# Altium PCB PCB.PcbDoc
Units mm, origin at the board's own origin, x right, y up, seen from the top; angles counter-clockwise.
Board outline 149.35 x 79.76 mm, 2 copper layers (Top Layer, Bottom Layer); 13 components, 17 nets, 83 pads, 0 vias.
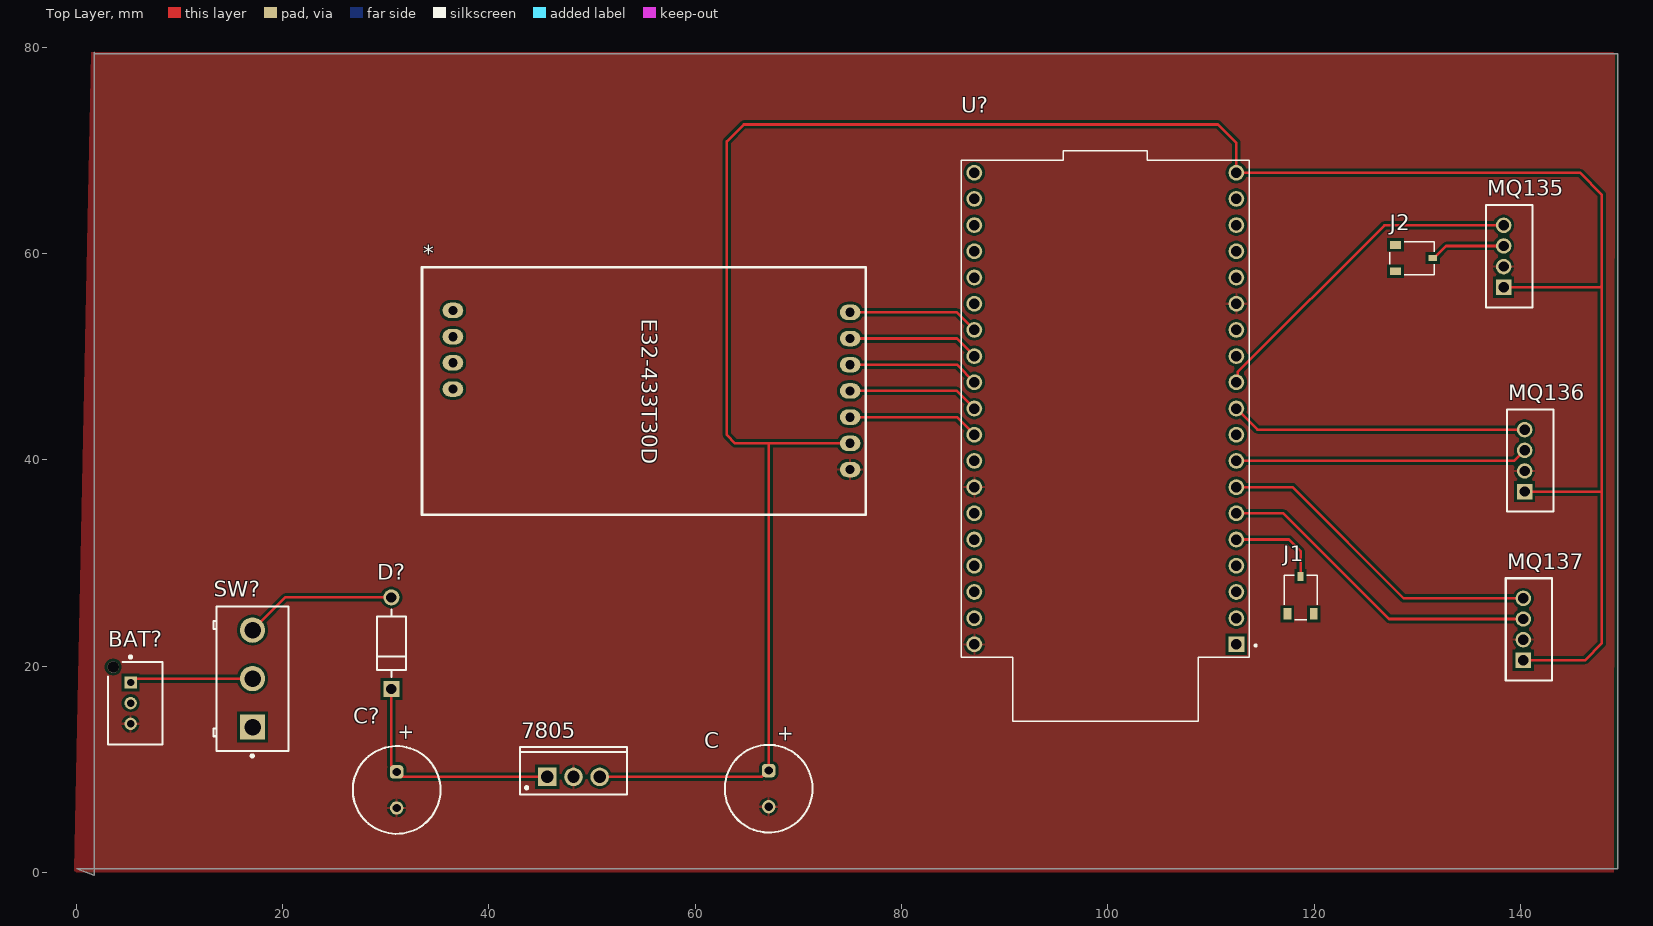
[diagram p0: Top Layer view]
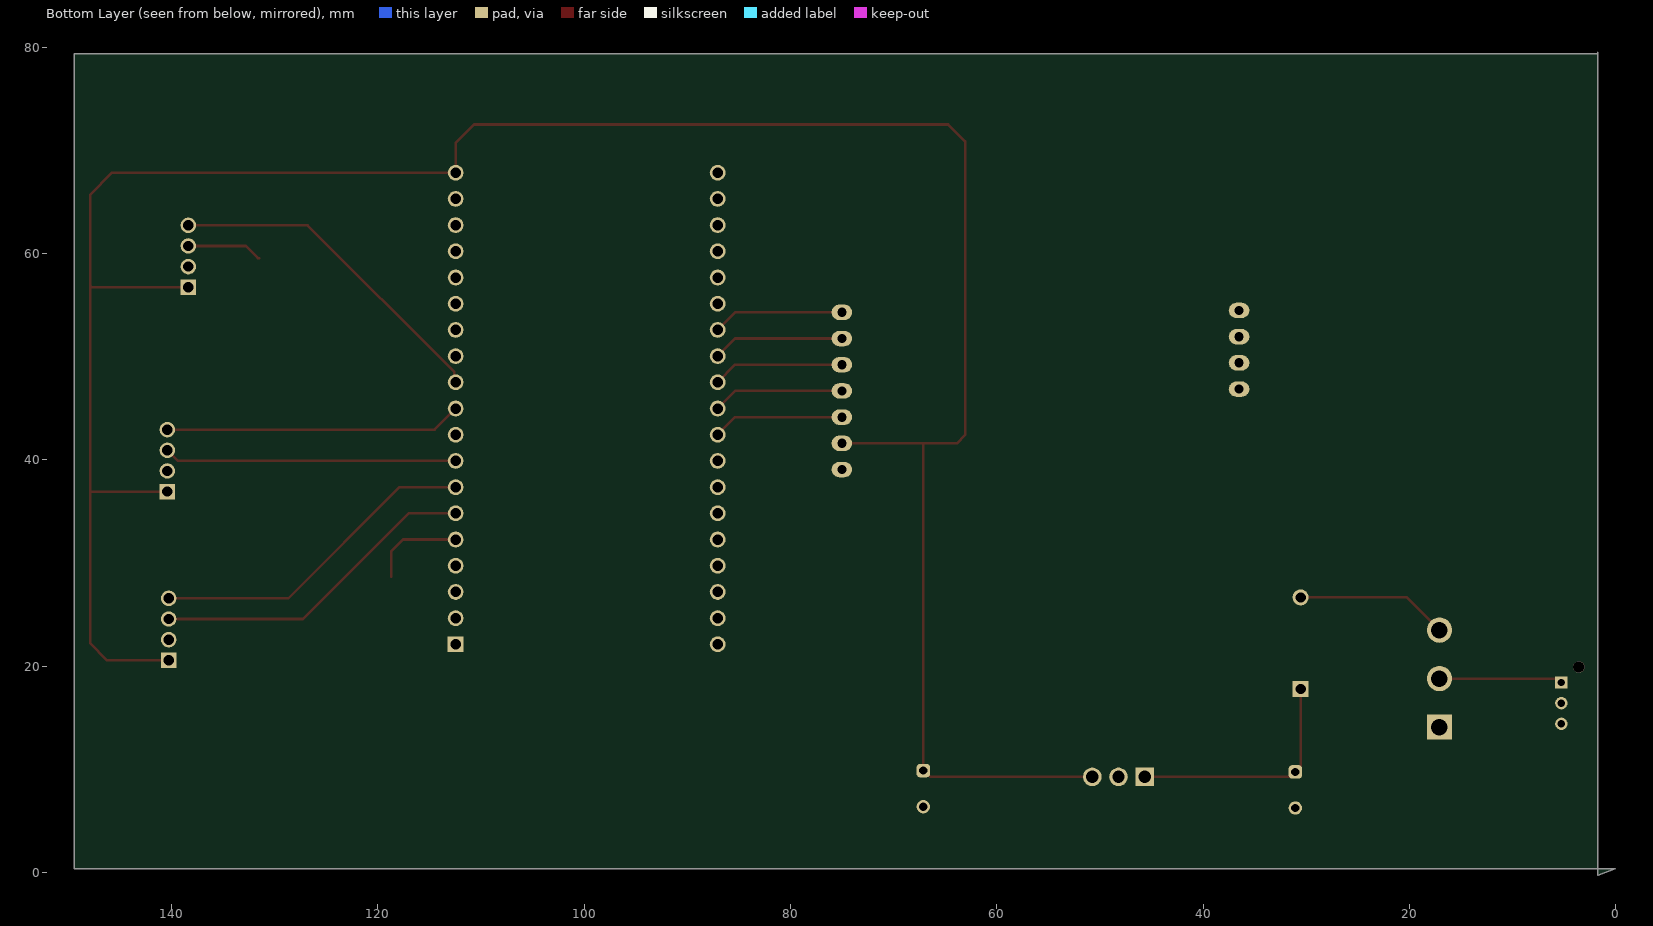
[diagram p1: Bottom Layer view, seen from below]

## Layer stack, top to bottom
Top Solder: solder mask 0.0102, Solder Resist, Dk 3.5
Top Layer: signal copper 0.0356
Dielectric 1: dielectric 0.32, FR-4, Dk 4.8
Bottom Layer: signal copper 0.0356
Bottom Solder: solder mask 0.0102, Solder Resist, Dk 3.5

## Board outline
0.072,0.381 149.424,0.381 149.424,79.375 1.85,79.375 1.723,79.502 1.723,-0.254

## Design rules (kind name [scope] priority, off if disabled: settings)
Clearance [All] p1: gap=0.254 ignorepadtopadclearanceinfootprint=FALSE
PolygonConnect [All] p1: connectstyle=Relief reliefconductorwidth=0.254 reliefentries=4 polygonreliefangle="90 Angle" airgapwidth=0.254
RoutingVias [All] p1: holewidth=0.711 width=1.27 viastyle="Through Hole" minholewidth=0.711 minwidth=1.27 maxholewidth=0.711 maxwidth=1.27
SolderMaskExpansion [All] p1: expansion=0 istentingtop=FALSE
SupplyNets "Schematic Supply Nets_1" [InNet('+5')] p1: voltage=0.000
SupplyNets "Schematic Supply Nets" [InNet('GND')] p2: voltage=0.000
Width [All] p1: maxlimit=0.254 minlimit=0.254 preferedwidth=0.254
30 further rules are at their usual default settings.

## Components (designator, comment, footprint, x,y, rotation, side; value= is the part's Value field where it differs from the comment)
7805 "L7805CP" TO220FP 48.205,9.271 r0 top
* "E32-433T30D" E32-433T30D 33.521,58.683 r270 top
BAT? "B03B-PASK-1(LF)(SN)" FP-B03B-PASK-1_LF_SN-MFG 5.729,16.415 r90 top
C "860160274015" WCAP-ATLL_D8H11.5 67.128,8.128 r90 top
C? "860160274015" WCAP-ATLL_D8H11.5 31.06,8.001 r90 top
D? "1N4007" FP-1N4007-MFG 30.552,22.225 r90 top value=15pF
J1 "BM01B-ACHSS-A-GAN-ETF(LF)(SN)" JST_BM01B-ACHSS-A-GAN-ETF(LF)(SN) 118.69,26.67 r0 top
J2 "BM01B-ACHSS-A-GAN-ETF(LF)(SN)" JST_BM01B-ACHSS-A-GAN-ETF(LF)(SN) 129.485,59.563 r270 top
MQ135 "B4B-PH-K-S(LF)(SN)" JST-B4B-PH-K-S_V 138.925,59.738 r90 top
MQ136 "B4B-PH-K-S(LF)(SN)" JST-B4B-PH-K-S_V 140.957,39.926 r90 top
MQ137 "B4B-PH-K-S(LF)(SN)" JST-B4B-PH-K-S_V 140.83,23.574 r90 top
SW? "CS12ANW03" FP-CS12ANW03-MFG 17.09,18.796 r90 top
U? "ESP32-DEVKITC" MODULE_ESP32-DEVKITC 99.767,44.968 r180 top

## Footprints (in the part's own frame and the unit in brackets; to place one, negate y for a bottom-side part, rotate by r counter-clockwise, add the part's x,y. Pads: shape width x height; smd on the part's side, far side on the other; paste and mask are expansions set on the pad)
E32-433T30D [mm]
  oval 1.5x2 hole 0.9: 1(4.38,41.5) 2(6.92,41.5) 3(9.46,41.5) 4(12,41.5) 5(14.54,41.5) 6(17.08,41.5) 7(19.62,41.5) 8(11.82,3) 9(9.28,3) 10(6.74,3) 11(4.2,3)
  silkscreen extent 0,0 24,43
FP-1N4007-MFG [mm]
  rect 1.55x1.55 hole 1 paste-2539.97 mask+0: 1(-4.44,0)
  round 1.55 hole 1 paste-2539.97 mask+0: 2(4.44,0)
  silkscreen extent -3.26,-1.4 3.26,1.4, body extent -5.32,-1.5 5.32,1.5, height 0.25
FP-B03B-PASK-1_LF_SN-MFG [mm]
  rect 1.2x1.2 hole 0.7 paste-2539.97 mask+0: 1(2,0.45)
  round 1.2 hole 0.7 paste-2539.97 mask+0: 2(0,0.45) 3(-2,0.45)
  round 1.1 hole 1.1 unplated paste-2539.97 mask+0: ""(3.5,2.15)
  silkscreen extent -4,-2.65 4.6,2.65, body extent -4.1,-2.75 4.15,2.8, height 0.25
FP-CS12ANW03-MFG [mm]
  rect 2.45x2.45 hole 1.6 paste-2539.97 mask+0: 1(-4.7,0)
  round 2.45 hole 1.6 paste-2539.97 mask+0: 2(0,0) 3(4.7,0)
  silkscreen extent -7.62,-3.5 7,3.8, body extent -7.1,-3.6 7.1,3.91, height 0.25
JST-B4B-PH-K-S_V [mm] "Connector, 4-Leads, Body 9.9x4.5mm, Pitch 2mm"
  rect 1.5x1.5 hole 1: 1(-3,0.55)
  round 1.5 hole 1: 2(-1,0.55) 3(1,0.55) 4(3,0.55)
  silkscreen extent -4.95,-2.25 4.95,2.25, body extent -4.95,-2.25 4.95,2.25, height 6
JST_BM01B-ACHSS-A-GAN-ETF(LF)(SN) [mm]
  rect 0.6x0.85 smd paste+0 mask+0.102: 1(0,2.025)
  rect 0.75x1.1 smd paste+0 mask+0.102: MP1(-1.275,-1.6) MP2(1.275,-1.6)
  silkscreen extent -1.6,-2.15 1.6,2.15
MODULE_ESP32-DEVKITC [mm]
  rect 1.53x1.53 / inner round 1.53 / far side rect 1.53x1.53 hole 1.02: 1(-12.7,22.85)
  round 1.53 hole 1.02: 2(-12.7,20.31) 3(-12.7,17.77) 4(-12.7,15.23) 5(-12.7,12.69) 6(-12.7,10.15) 7(-12.7,7.61) 8(-12.7,5.07) 9(-12.7,2.53) 10(-12.7,-0.01) 11(-12.7,-2.55) 12(-12.7,-5.09) 13(-12.7,-7.63) 14(-12.7,-10.17) 15(-12.7,-12.71) 16(-12.7,-15.25) 17(-12.7,-17.79) 18(-12.7,-20.33) 19(-12.7,-22.87) 20(12.7,-22.87) 21(12.7,-20.33) 22(12.7,-17.79) 23(12.7,-15.25) 24(12.7,-12.71) 25(12.7,-10.17) 26(12.7,-7.63) 27(12.7,-5.09) 28(12.7,-2.55) 29(12.7,-0.01) 30(12.7,2.53) 31(12.7,5.07) 32(12.7,7.61) 33(12.7,10.15) 34(12.7,12.69) 35(12.7,15.23) 36(12.7,17.77) 37(12.7,20.31) 38(12.7,22.85)
  silkscreen extent -14.67,-25 13.95,30.3, body extent -13.97,-27.9 13.97,27.2, height 6.69
TO220FP [mm] "TO, Thru-Hole, Vertical, Heatsink Mounted; 3 In-Line Leads; Pitch 2.54 mm"
  rect 1.8x1.8 hole 1.2: 1(-2.54,0)
  round 1.8 hole 1.2: 2(0,0) 3(2.54,0)
  silkscreen extent -5.2,-1.7 5.2,2.9, body extent -5.25,-1.75 5.25,2.95, height 20
WCAP-ATLL_D8H11.5 [mm] "Aluminum Electrolytic Capacitors, 8x11.5mm"
  rrect50% 1.3x1.3 hole 0.8: 1(1.75,0)
  round 1.3 hole 0.8: 2(-1.75,0)
  silkscreen extent -4.25,-4.25 4.25,4.25, body extent -3.99,-4 4,4, height 11.81

## Part data
7805: library part CMP-0244-00474-1, "Positive Voltage Regulator, 5V, 3-Pin TO-220FP", ComponentLink1Description="Manufacturer URL", ComponentLink1URL=http://www.st.com, ComponentLink2Description=Datasheet, ComponentLink2URL=http://www.st.com/internet/com/TECHNICAL_RESOURCES/TECHNICAL_LITERATURE/DATASHEET/CD00000444.pdf, DatasheetVersion=16/11/2011, PackageDescription="TO, Thru-Hole, Vertical, Heatsink Mounted; 3 In-Line Leads; Pitch 2.54 mm", PackageReference=TO220FP, PackageVersion=2011
BAT?: library part CMP-17439-000193-1, "CONN HEADER VERT 3POS 2MM", Color=Natural, Current Rating=3A, Flammability Rating="UL94 V-0", Housing Color=White, Voltage Rating=250V, Connector Type=Header, Contact Finish - Mating=TIN, Contact Material="Copper Alloy", Contact Mating Length=0.126inch, Contact Plating=Tin, Contact Shape=Square, Contact Type="Male Pin", Fastening Type=Ramp, Insulation Color=Natural, Insulation Material=PBT, Lead Free="Lead Free", Mated Stacking Heights=14.9mm, Mount="Through Hole", Number of Contacts=3, Number of Positions=3, Number of Rows=1, Orientation=Straight, Packaging=Bulk, Pitch=2mm, Series=PA, Termination=Solder
C C?: library part CMP-03913-54007388-2, "Aluminium Electrolytic Capacitor-Leaded Rohs Compliant: Yes", Capacitance=270µF, Case/Package=Radial, Leakage Current=27µA, Max Operating Temperature=105°C, Min Operating Temperature=-55°C, Ripple Current=420mA, Tolerance=20%, Voltage Rating=10V, Diameter=8mm, Height - Seated (Max)=13.0048mm, Impedance=530mΩ, Lead Pitch=3.5052mm, Length=11.5mm, Life (Hours)=7000hours, Mount="Through Hole", Packaging="Tape & Box (TB)", Pitch=3.5mm, Polarity=Polar, RoHS=Compliant
D?: library part CMP-123542-000001-1, "Rectifier diode 1000 V 1 A DO-41, ,", Capacitance=15pF, Forward Current=1A, Manufacturer=Diotec, Max Junction Temp=+175°C, Max Repetitive Reverse Voltage=1000V, Max Surge Forward Current=27A, Peak Reverse Current=5uA, Temperature="-50°C to +175°C", Temperature Range Low=-50°C, Automotive=No, Category=Diode, ComponentLink2Description=Datasheet, ComponentLink2URL=https://datasheet.octopart.com/1N4007-Diotec-datasheet-62346875.pdf, Device Class L1="Discrete Semiconductors", Device Class L2=Diodes, Device Class L3="Rectifier Diodes", Height=2.8mm, Ipc Land Pattern Name=DIOAD888W100L520D280, Lead Free=Yes, Manufacturer Part Number=1N4007, Octopart=https://octopart.com/1n4007-diotec-4040411, Package=1N4007, Reverse Voltage=1000V, RoHS=TRUE, Temperature Range High=+175°C
J1 J2: "Connector Header Surface Mount, Right Angle 1 position", Package=None, Check_prices=https://www.snapeda.com/parts/BM01B-ACHSS-A-GAN-ETF(LF)(SN)/JST/view-part/?ref=eda, MF="JST Sales America Inc.", MP=BM01B-ACHSS-A-GAN-ETF(LF)(SN), SnapEDA_Link=https://www.snapeda.com/parts/BM01B-ACHSS-A-GAN-ETF(LF)(SN)/JST/view-part/?ref=snap
MQ135 MQ136 MQ137: library part CMP-2000-05165-1, "Male Header, Pitch 2 mm, 1 x 4 Position, Height 6 mm, Tail Length 3.4 mm, -25 to 85 degC, RoHS, Bulk", Manufacturer=JST, Datasheet URL=http://datasheet.octopart.com/B4B-PH-K-S%28LF%29%28SN%29-JST-datasheet-10558886.pdf, Datasheet Version=Apr-09, Manufacturer URL=http://www.jst.com/home2.html, No of Positions=4, Pitch=2mm, Style/Orientation=StraightHeader/Plug, Termination=Crimp, Type=ShroudedHeader
SW?: library part CMP-31746-000002-1, "SWITCH SLIDE SPDT 3A 125V", Contact Current Rating=3A, Flammability Rating="UL94 V-0", Max Operating Temperature=85°C, Max Voltage Rating (AC)=250V, Min Operating Temperature=-30°C, Package Quantity=1, Voltage Rating (AC)=125V, Actuator Length=5.1mm, Actuator Material=Nylon, Actuator Type=Standard, Contact Material=Copper, Contact Plating=Silver, Contact Style=Non-Shorting, Current Rating=3A, Depth=7.5mm, Electrical Life=20000Cycles, Illumination Type=Non-Illuminated, Lead Free="Lead Free", Length=14mm, Max Current Rating=3A, Mechanical Life=50000Cycles, Mount="Through Hole", Orientation=Vertical, Packaging=Tray, Primary Type=SWITCH, Reach SVHC Compliant=Yes, RoHS Compliant=Yes, Series=CS, Switch Function=On-On, Switch Travel=2.2mm, Termination="PC Pin", Throw Configuration=SPDT
U?: "Transceiver; 802.11 b/g/n (Wi-Fi, WiFi, WLAN), BluetoothÂ® Smart Ready 4.x Dual Mode", Package=None, Check_prices=https://www.snapeda.com/parts/ESP32-DEVKITC-32D-F/Espressif+Systems/view-part/?ref=eda, MF="Espressif Systems", MP=ESP32-DEVKITC-32D-F, SnapEDA_Link=https://www.snapeda.com/parts/ESP32-DEVKITC-32D-F/Espressif+Systems/view-part/?ref=snap

## Nets (pads, with @x,y where several pads share a name; then routed paths per layer and width w, separated by ;. In a path a pad name is that pad's centre, name@x,y a point inside that pad or via, vN(x,y) a via of type N, cw(c..) or ccw(c..) an arc to the next point about the centre after c; other vN are vias at no path point)
+5: 7805.3 *.6 C.1 MQ135.1 MQ136.1 MQ137.1 U?.19 | length 248
  Top Layer w0.254: 7805.3 66.414,9.271 67.021,9.878 C.1 67.128,41.603 ; *.6 67.128,41.603 ; MQ135.1 147.752,56.738 147.9,56.887 ; MQ137.1 146.249,20.574 147.9,22.225 147.9,36.957 ; MQ136.1 147.869,36.926 147.9,36.957 ; 67.128,41.603 63.879,41.603 63.064,42.418 63.064,70.866 64.715,72.517 110.689,72.517 112.467,70.739 U?.19 145.761,67.838 147.9,65.699 147.9,56.887 ; 147.9,36.957 147.9,56.887
GND: 7805.2 *.7 BAT?.3 C.2 C?.2 MQ135.2 MQ136.2 MQ137.2 U?.14 U?.32 U?.38
Net7805_1: 7805.1 C?.1 D?.1 | length 23
  Top Layer w0.254: D?.1 30.552,10.366 31.06,9.858 C?.1 31.168,9.751 31.648,9.271 7805.1
Net*_1: *.1 U?.26 | length 12.8
  Top Layer w0.254: *.1 85.362,54.303 U?.26
Net*_2: *.2 U?.27 | length 12.8
  Top Layer w0.254: *.2 85.362,51.763 U?.27
Net*_3: *.3 U?.28 | length 12.8
  Top Layer w0.254: *.3 85.362,49.223 U?.28
Net*_4: *.4 U?.29 | length 12.8
  Top Layer w0.254: *.4 85.362,46.683 U?.29
Net*_5: *.5 U?.30 | length 12.8
  Top Layer w0.254: *.5 85.362,44.143 U?.30
NetBAT?_1: BAT?.1 SW?.2 | length 12
  Top Layer w0.254: BAT?.1 5.66,18.796 SW?.2
NetD?_2: D?.2 SW?.3 | length 14.8
  Top Layer w0.254: SW?.3 20.259,26.665 D?.2
NetJ1_1: J1.1 U?.5 | length 9.2
  Top Layer w0.254: U?.5 117.567,32.278 117.569,32.28 118.69,31.159 J1.1
NetJ2_1: J2.1 MQ135.3 | length 7.4
  Top Layer w0.254: J2.1 131.635,59.563 132.81,60.738 MQ135.3
NetMQ135_4: MQ135.4 U?.11 | length 32.7
  Top Layer w0.254: U?.11 112.589,47.64 112.589,48.509 126.818,62.738 MQ135.4
NetMQ136_3: MQ136.3 U?.8 | length 28.4
  Top Layer w0.254: U?.8 139.379,39.898 MQ136.3
NetMQ136_4: MQ136.4 U?.10 | length 28.8
  Top Layer w0.254: U?.10 114.519,42.926 MQ136.4
NetMQ137_3: MQ137.3 U?.6 | length 32.1
  Top Layer w0.254: U?.6 117.019,34.818 127.263,24.574 MQ137.3
NetMQ137_4: MQ137.4 U?.7 | length 32.3
  Top Layer w0.254: U?.7 117.908,37.358 128.692,26.574 MQ137.4
pads on no net: *.8 *.9 *.10 *.11 BAT?. BAT?.2 J1.MP1 J1.MP2 J2.MP1 J2.MP2 SW?.1 U?.1 U?.2 U?.3 U?.4 U?.9 U?.12 U?.13 U?.15 U?.16 U?.17 U?.18 U?.20 U?.21 U?.22 U?.23 U?.24 U?.25 U?.31 U?.33 U?.34 U?.35 U?.36 U?.37

## Polygon pours and split planes (outlines as drawn)
GND on Top Layer "GND_L01_P000" (solid, pour order 0): 1.477,79.502 149.162,79.502 149.043,0 -0.182,0

## Text inside footprints (layer, text, board x,y; h text height)
C: Top Overlay "+" at 69.342,12.573 h1.5 r90
C?: Top Overlay "+" at 32.584,12.7 h1.5 r90